# EAGLE board CT_schematic (EAGLE 7.6.0)

Size 100 x 80 mm. Coordinates in mm from the lower left corner, seen from the top.
Outline: 0,0 100,0 100,80 0,80 0,0
Copper layers (1*16): Top 0.035mm / dielectric 1.5mm / Bottom 0.035mm
Design rules "default": minimum track width 10mil, minimum drill 24mil, track to track 8mil, track to pad 8mil, pad to pad 8mil, via to via 8mil, smd to smd 8mil, copper to edge 40mil, drill to drill 8mil, minimum pad ring 10mil, minimum via ring 8mil, stop-mask expansion 4mil, vias tented up to drill 0mil, thermal gap 10mil

## Footprints (pad centres in the part's own frame; a part is rotated, then mirrored left to right if it is on the bottom)
C0603 = smd 0.8 x 0.8: 1 -0.762,0; 2 0.762,0
C0402 = smd 0.5 x 0.5: 1 -0.508,0; 2 0.508,0
C1210 = smd 1.2 x 2.5: 1 -1.524,0; 2 1.524,0
C0805 = smd 1.2 x 1.3: 1 -1.016,0; 2 1.016,0
C1206 = smd 1.3 x 1.6: 1 -1.524,0; 2 1.524,0
L0603 = smd 0.8 x 0.8: 1 -0.762,0; 2 0.762,0
L0805 = smd 1.2 x 1.3: 1 -1.016,0; 2 1.016,0
R0603 = smd 0.8 x 0.8: 1 -0.762,0; 2 0.762,0
UFQFPN48 = smd 0.559 x 0.305: 1 -3.375,2.751; 2 -3.375,2.251; 3 -3.375,1.75; 4 -3.375,1.25; 5 -3.375,0.75; 6 -3.375,0.25; 7 -3.375,-0.25; 8 -3.375,-0.75; 9 -3.375,-1.25; 10 -3.375,-1.75; 11 -3.375,-2.251; 12 -3.375,-2.751; 25 3.375,-2.751; 26 3.375,-2.251; 27 3.375,-1.75; 28 3.375,-1.25; 29 3.375,-0.75; 30 3.375,-0.25; 31 3.375,0.25; 32 3.375,0.75; 33 3.375,1.25; 34 3.375,1.75; 35 3.375,2.251; 36 3.375,2.751 | smd 0.305 x 0.559: 13 -2.751,-3.375; 14 -2.251,-3.375; 15 -1.75,-3.375; 16 -1.25,-3.375; 17 -0.75,-3.375; 18 -0.25,-3.375; 19 0.25,-3.375; 20 0.75,-3.375; 21 1.25,-3.375; 22 1.75,-3.375; 23 2.251,-3.375; 24 2.751,-3.375; 37 2.751,3.375; 38 2.251,3.375; 39 1.75,3.375; 40 1.25,3.375; 41 0.75,3.375; 42 0.25,3.375; 43 -0.25,3.375; 44 -0.75,3.375; 45 -1.25,3.375; 46 -1.75,3.375; 47 -2.251,3.375; 48 -2.751,3.375 | smd 5.588 x 5.588: 49 0,0
SAMTEC_FTSH-105-01-L-DV-K = smd 0.762 x 2.794: 1 -2.54,-2.032; 2 -2.54,2.032; 3 -1.27,-2.032; 4 -1.27,2.032; 5 0,-2.032; 6 0,2.032; 7 1.27,-2.032; 8 1.27,2.032; 9 2.54,-2.032; 10 2.54,2.032
QFN-28 = smd 0.813 x 0.305: 1 -2.451,1.5; 2 -2.451,1; 3 -2.451,0.5; 4 -2.451,0; 5 -2.451,-0.5; 6 -2.451,-1; 7 -2.451,-1.5; 15 2.451,-1.5; 16 2.451,-1; 17 2.451,-0.5; 18 2.451,0; 19 2.451,0.5; 20 2.451,1; 21 2.451,1.5 | smd 0.305 x 0.813: 8 -1.5,-2.451; 9 -1,-2.451; 10 -0.5,-2.451; 11 0,-2.451; 12 0.5,-2.451; 13 1,-2.451; 14 1.5,-2.451; 22 1.5,2.451; 23 1,2.451; 24 0.5,2.451; 25 0,2.451; 26 -0.5,2.451; 27 -1,2.451; 28 -1.5,2.451 | smd 3.607 x 3.607: 29 0,0
SJ-43515TS-SMT-TR = smd 2.2 x 3: 1 0.6,-7.4; 4 3.4,-7.4 | smd 3 x 3: 2 12.8,-7.4; 5 17,-3 | smd 2 x 3: 3 5.3,0; 6 2.5,0 | drill 1.8: P$7 4.5,-3.69; P$8 11.54,-3.69
ABS07-32.768KHZ-7-T = smd 1.1 x 2.4: 1 -2.5,0; 2 0,0
ABLS-12.288MHZ-B4-T = smd 5.6 x 2.8: 1 -3.81,0; 2 5.69,0
ASFL1 = smd 1.7 x 1.5: 1 -1.27,-1.1; 2 1.27,-1.1; 3 1.27,1.1; 4 -1.27,1.1
TSOT-23-5 = smd 1.3 x 0.62: 1 -1.31,0.95; 2 -1.31,0; 3 -1.31,-0.95; 4 1.31,-0.95; 5 1.31,0.95
DFN8_2X3MC = smd 0.813 x 0.305: 1 -1.398,0.75; 2 -1.398,0.25; 3 -1.398,-0.25; 4 -1.398,-0.75; 5 1.398,-0.75; 6 1.398,-0.25; 7 1.398,0.25; 8 1.398,0.75 | smd 1.753 x 1.549: 9 0,0
JST-2-SMD = smd 1 x 4.6: 1 -1,-3.7; 2 1,-3.7 | smd 1.6 x 3.4: NC1 -3.4,1.5; NC2 3.4,1.5
FCI_10118193-0001LF = smd 0.4 x 1.35: 1 -1.3,2.675; 2 -0.65,2.675; 3 0,2.675; 4 0.65,2.675; 5 1.3,2.675 | smd 1.6 x 1.4: 6 -3.2,2.45; 7 3.2,2.45 | smd 1.9 x 1.9: 8 -1.2,0; 9 1.2,0 | hole 0.5: -3.3,0; 3.3,0
SON-6 = smd 0.55 x 0.3: 1 -0.355,0.5 | smd 0.52 x 0.3: 2 -0.37,0; 3 -0.37,-0.5; 4 0.37,-0.5; 5 0.37,0; 6 0.37,0.5
SW_4-1437565-2 = smd 1.4 x 2.1: 1 -2.23,4.55; 2 -2.23,-4.55; 3 2.23,4.55; 4 2.23,-4.55
LGM67K-G1J2-24-Z = smd 0.8 x 1.4: A -2,0; C 0,0
NC7SZ125M5X = smd 1.3 x 0.7: 1 -1.3,0.95; 2 -1.3,0; 3 -1.3,-0.95; 4 1.3,-0.95; 5 1.3,0.95

## Placement (x,y rotation side)
C1  1e-06  [C0603]  -43.18,60.96 0 top  (outside the outline)
C2  1e-07  [C0603]  -46.99,60.96 0 top  (outside the outline)
C3  1e-07  [C0603]  -50.8,60.96 0 top  (outside the outline)
C4  1e-07  [C0603]  -54.61,60.96 0 top  (outside the outline)
C5  4.7e-06  [C0603]  -39.37,60.96 0 top  (outside the outline)
C6  1e-07  [C0603]  -58.42,60.96 0 top  (outside the outline)
C7  1e-07  [C0603]  -62.23,60.96 0 top  (outside the outline)
C8  1e-08  [C0603]  -66.04,60.96 0 top  (outside the outline)
C9  1e-06  [C0603]  -69.85,60.96 0 top  (outside the outline)
C10  1e-11  [C0402]  -54.61,66.04 0 top  (outside the outline)
C11  1e-11  [C0402]  -58.42,66.04 0 top  (outside the outline)
C12  1e-07  [C0402]  -62.23,66.04 0 top  (outside the outline)
C13  2.2e-05  [C1210]  -57.15,41.91 0 top  (outside the outline)
C14  2.2e-05  [C1210]  -63.5,41.91 0 top  (outside the outline)
C15  1e-09  [C0402]  -66.04,66.04 0 top  (outside the outline)
C16  1e-09  [C0402]  -69.85,66.04 0 top  (outside the outline)
C17  1e-07  [C0402]  -15.24,71.12 0 top  (outside the outline)
C18  1e-07  [C0402]  -19.05,71.12 0 top  (outside the outline)
C19  1e-07  [C0402]  -22.86,71.12 0 top  (outside the outline)
C20  1e-07  [C0402]  -26.67,71.12 0 top  (outside the outline)
C21  1e-07  [C0402]  -30.48,71.12 0 top  (outside the outline)
C22  1e-05  [C0805]  -34.29,49.53 0 top  (outside the outline)
C23  1e-05  [C0805]  -39.37,49.53 0 top  (outside the outline)
C24  1e-05  [C0805]  -44.45,49.53 0 top  (outside the outline)
C25  1e-05  [C0805]  -49.53,49.53 0 top  (outside the outline)
C26  1e-05  [C0805]  -54.61,49.53 0 top  (outside the outline)
C27  2.2e-11  [C0402]  -46.99,66.04 0 top  (outside the outline)
C28  2.2e-11  [C0402]  -50.8,66.04 0 top  (outside the outline)
C29  1e-08  [C0402]  -34.29,71.12 0 top  (outside the outline)
C30  1e-05  [C0805]  -59.69,49.53 0 top  (outside the outline)
C31  1e-05  [C0805]  -64.77,49.53 0 top  (outside the outline)
C32  1e-07  [C0402]  -38.1,71.12 0 top  (outside the outline)
C33  1e-05  [C1206]  -69.85,41.91 0 top  (outside the outline)
C34  1e-05  [C1206]  -16.51,49.53 0 top  (outside the outline)
C35  1e-08  [C0402]  -41.91,71.12 0 top  (outside the outline)
C36  1e-08  [C0402]  -45.72,71.12 0 top  (outside the outline)
F1  240.0  [L0603]  -15.24,66.04 0 top  (outside the outline)
I1  2.2e-06  [L0805]  -69.85,49.53 0 top  (outside the outline)
R1  10000.0  [R0603]  -43.18,55.88 0 top  (outside the outline)
R2  1000.0  [R0603]  -19.05,66.04 0 top  (outside the outline)
R3  1600.5  [R0603]  -22.86,66.04 0 top  (outside the outline)
R4  4700.0  [R0603]  -26.67,66.04 0 top  (outside the outline)
R5  10000.0  [R0603]  -48.26,55.88 0 top  (outside the outline)
R6  10000.0  [R0603]  -53.34,55.88 0 top  (outside the outline)
R7  10000.0  [R0603]  -58.42,55.88 0 top  (outside the outline)
R8  10000.0  [R0603]  -63.5,55.88 0 top  (outside the outline)
R9  5.0  [R0603]  -30.48,66.04 0 top  (outside the outline)
R10  47000.0  [R0603]  -68.58,55.88 0 top  (outside the outline)
R11  47000.0  [R0603]  -15.24,60.96 0 top  (outside the outline)
R12  47000.0  [R0603]  -20.32,60.96 0 top  (outside the outline)
R13  680.0  [R0603]  -34.29,66.04 0 top  (outside the outline)
R14  220000.0  [R0603]  -27.94,55.88 0 top  (outside the outline)
R15  1000000.0  [R0603]  -22.86,55.88 0 top  (outside the outline)
R16  10000.0  [R0603]  -25.4,60.96 0 top  (outside the outline)
R17  10000.0  [R0603]  -30.48,60.96 0 top  (outside the outline)
R18  9100.0  [R0603]  -38.1,66.04 0 top  (outside the outline)
R19  680000.0  [R0603]  -33.02,55.88 0 top  (outside the outline)
R20  120000.0  [R0603]  -38.1,55.88 0 top  (outside the outline)
R21  2000.0  [R0603]  -41.91,66.04 0 top  (outside the outline)
R22  10000.0  [R0603]  -35.56,60.96 0 top  (outside the outline)
U1  stm32f071cbu7  [UFQFPN48]  -17.78,33.02 0 top  (outside the outline)
U2  FTSH-105-01-L-DV-K  [SAMTEC_FTSH-105-01-L-DV-K]  -35.56,7.62 0 top  (outside the outline)
U3  WM8731CLSEFL  [QFN-28]  -49.53,41.91 0 top  (outside the outline)
U4  SJ-43515TS-SMT-TR  [SJ-43515TS-SMT-TR]  -68.58,10.16 0 top  (outside the outline)
U5  SJ-43515TS-SMT-TR  [SJ-43515TS-SMT-TR]  -39.37,24.13 0 top  (outside the outline)
U6  ABS07-32.768KHZ-7-T  [ABS07-32.768KHZ-7-T]  -27.94,43.18 0 top  (outside the outline)
U7  ABLS-12.288MHZ-B4-T  [ABLS-12.288MHZ-B4-T]  -63.5,33.02 0 top  (outside the outline)
U8  ASFL1-25MHZ-NCS  [ASFL1]  -36.83,34.29 0 top  (outside the outline)
U9  ltc3406es5  [TSOT-23-5]  -15.24,54.61 0 top  (outside the outline)
U10  MCP73831T-2ACI/MC  [DFN8_2X3MC]  -54.61,69.85 0 top  (outside the outline)
U11  S2B-PH-SM4-TB(LF)(SN)  [JST-2-SMD]  -69.85,21.59 0 top  (outside the outline)
U12  10118193-0001LF  [FCI_10118193-0001LF]  -45.72,33.02 0 top  (outside the outline)
U13  TPS3895ADRYR  [SON-6]  -48.26,69.85 0 top  (outside the outline)
U14  4-1437565-2  [SW_4-1437565-2]  -55.88,21.59 0 top  (outside the outline)
U15  Q65110A2395  [LGM67K-G1J2-24-Z]  -36.83,41.91 0 top  (outside the outline)
U16  nc7sz125m5x  [NC7SZ125M5X]  -21.59,49.53 0 top  (outside the outline)
U17  nc7sz125m5x  [NC7SZ125M5X]  -27.94,49.53 0 top  (outside the outline)

## Library data of the parts
C1-C36 F1 I1 R1-R22 U1-U17 = circuit_tree

## Nets
CLK_CRYSTAL_U1_3: C10.1 U1.3 U6.1
CLK_CRYSTAL_U1_4: C11.1 U1.4 U6.2
CLK_CRYSTAL_U3_1: C27.1 U3.1 U7.1
CLK_CRYSTAL_U3_2: C28.1 U3.2 U7.2
CLK_U1_5: U1.5 U8.3
GND: C1.2 C2.2 C3.2 C4.2 C5.2 C6.2 C7.2 C8.2 C9.2 C10.2 C11.2 C12.2 C16.2 C17.2 C18.2 C19.2 C20.2 C21.2 C22.2 C23.2 C24.2 C25.2 C26.2 C27.2 C28.2 C29.2 C30.2 C31.1 C31.2 C32.2 C33.2 C34.2 C35.2 C36.2 R2.2 R5.2 R9.2 R10.2 R11.2 R12.2 R14.2 R18.2 R20.2 R21.2 U1.8 U1.23 U1.35 U1.47 U1.49 U2.3 U2.5 U3.4 U3.15 U3.19 U3.25 U3.26 U3.29 U4.1 U5.1 U8.2 U9.2 U10.6 U10.9 U11.2 U12.5 U12.6 U12.7 U12.8 U12.9 U13.2 U15.C U16.2 U16.3 U17.1 U17.3
INPUT_USBPOWER_5V: C33.1 R22.2 U10.1 U10.2 U12.1
NET_U1_7: R4.1 U1.7 U17.4
NET_U1_9: C8.1 C9.1 F1.1 U1.9
NET_U1_44: R5.1 U1.44
NET_U1_45: R3.1 U1.45 U15.A
NET_U1_46: R1.1 U1.46 U14.3 U14.4
NET_U2_9: R9.1 U2.9
NET_U3_9: U3.9
NET_U3_20: C21.1 C26.1 U3.20
NET_U4_2: C14.1 R11.1 U4.2
NET_U4_5: C13.1 R10.1 U4.5
NET_U4_13: C13.2
NET_U4_14: C14.2
NET_U5_5: C15.1 C16.1 R12.1 R13.1 U5.5
NET_U5_21: R13.2
NET_U5_22: C15.2
NET_U9_1: U9.1
NET_U9_3: I1.1 U9.3
NET_U9_5: R14.1 R15.1 U9.5
NET_U9_ATNET_3: I1.2 R15.2
NET_U10_5: R22.1 U10.5
NET_U10_8: R21.1 U10.8
NET_U13_1: R17.1 R18.1 U13.1
NET_U13_3: R19.2 R20.1 U13.3
NET_U13_4: R16.1 U13.4 U16.4 U17.2
NET_U14_1: R2.1 U14.1 U14.2
PROC_I2S1_CK: U1.15 U3.7
PROC_I2S1_SD: U1.17 U3.8
PROC_I2S1_WS: U1.14 U3.9 U3.11
PROC_SYS_SWCLK: R7.1 U1.37 U2.4
PROC_SYS_SWDIO: R8.1 U1.34 U2.2
RST_OUT_U2_JTAG_RST_B: R6.1 U2.10 U16.1
VCC_S1_3V7: C30.1 C34.1 U9.4 U10.3 U10.4 U11.1
VCC_TIER1_3V3: C1.1 C2.1 C3.1 C4.1 C5.1 C6.1 C7.1 C12.1 C17.1 C18.1 C19.1 C20.1 C22.1 C23.1 C24.1 C25.1 C29.1 C31.2 C32.1 C35.1 C36.1 F1.2 I1.2 R1.2 R3.2 R4.2 R6.2 R7.2 R8.2 R15.2 R16.2 R17.2 R19.1 U1.1 U1.24 U1.36 U1.48 U2.1 U3.3 U3.5 U3.12 U3.18 U8.4 U13.6 U16.5 U17.5

## Tracks (layer width: path | path; a pad name or v marks a point on that pad's centre or on a via)
CLK_CRYSTAL_U1_3  (2 unrouted)
CLK_CRYSTAL_U1_4  (2 unrouted)
CLK_CRYSTAL_U3_1  (2 unrouted)
CLK_CRYSTAL_U3_2  (2 unrouted)
CLK_U1_5  (1 unrouted)
GND  (74 unrouted)
INPUT_USBPOWER_5V  (4 unrouted)
NET_U1_7  (2 unrouted)
NET_U1_9  (3 unrouted)
NET_U1_44  (1 unrouted)
NET_U1_45  (2 unrouted)
NET_U1_46  (3 unrouted)
NET_U2_9  (1 unrouted)
NET_U3_20  (2 unrouted)
NET_U4_2  (2 unrouted)
NET_U4_5  (2 unrouted)
NET_U5_5  (4 unrouted)
NET_U9_3  (1 unrouted)
NET_U9_5  (2 unrouted)
NET_U9_ATNET_3  (1 unrouted)
NET_U10_5  (1 unrouted)
NET_U10_8  (1 unrouted)
NET_U13_1  (2 unrouted)
NET_U13_3  (2 unrouted)
NET_U13_4  (3 unrouted)
NET_U14_1  (2 unrouted)
PROC_I2S1_CK  (1 unrouted)
PROC_I2S1_SD  (1 unrouted)
PROC_I2S1_WS  (2 unrouted)
PROC_SYS_SWCLK  (2 unrouted)
PROC_SYS_SWDIO  (2 unrouted)
RST_OUT_U2_JTAG_RST_B  (2 unrouted)
VCC_S1_3V7  (5 unrouted)
VCC_TIER1_3V3  (45 unrouted)